# Altium PCB V2.PcbDoc
Units mm, origin at the board's own origin, x right, y up, seen from the top; angles counter-clockwise.
Board outline 33.02 x 29.34 mm, 2 copper layers (Top Layer, Bottom Layer); 2 components, 24 nets, 48 pads, 28 vias.
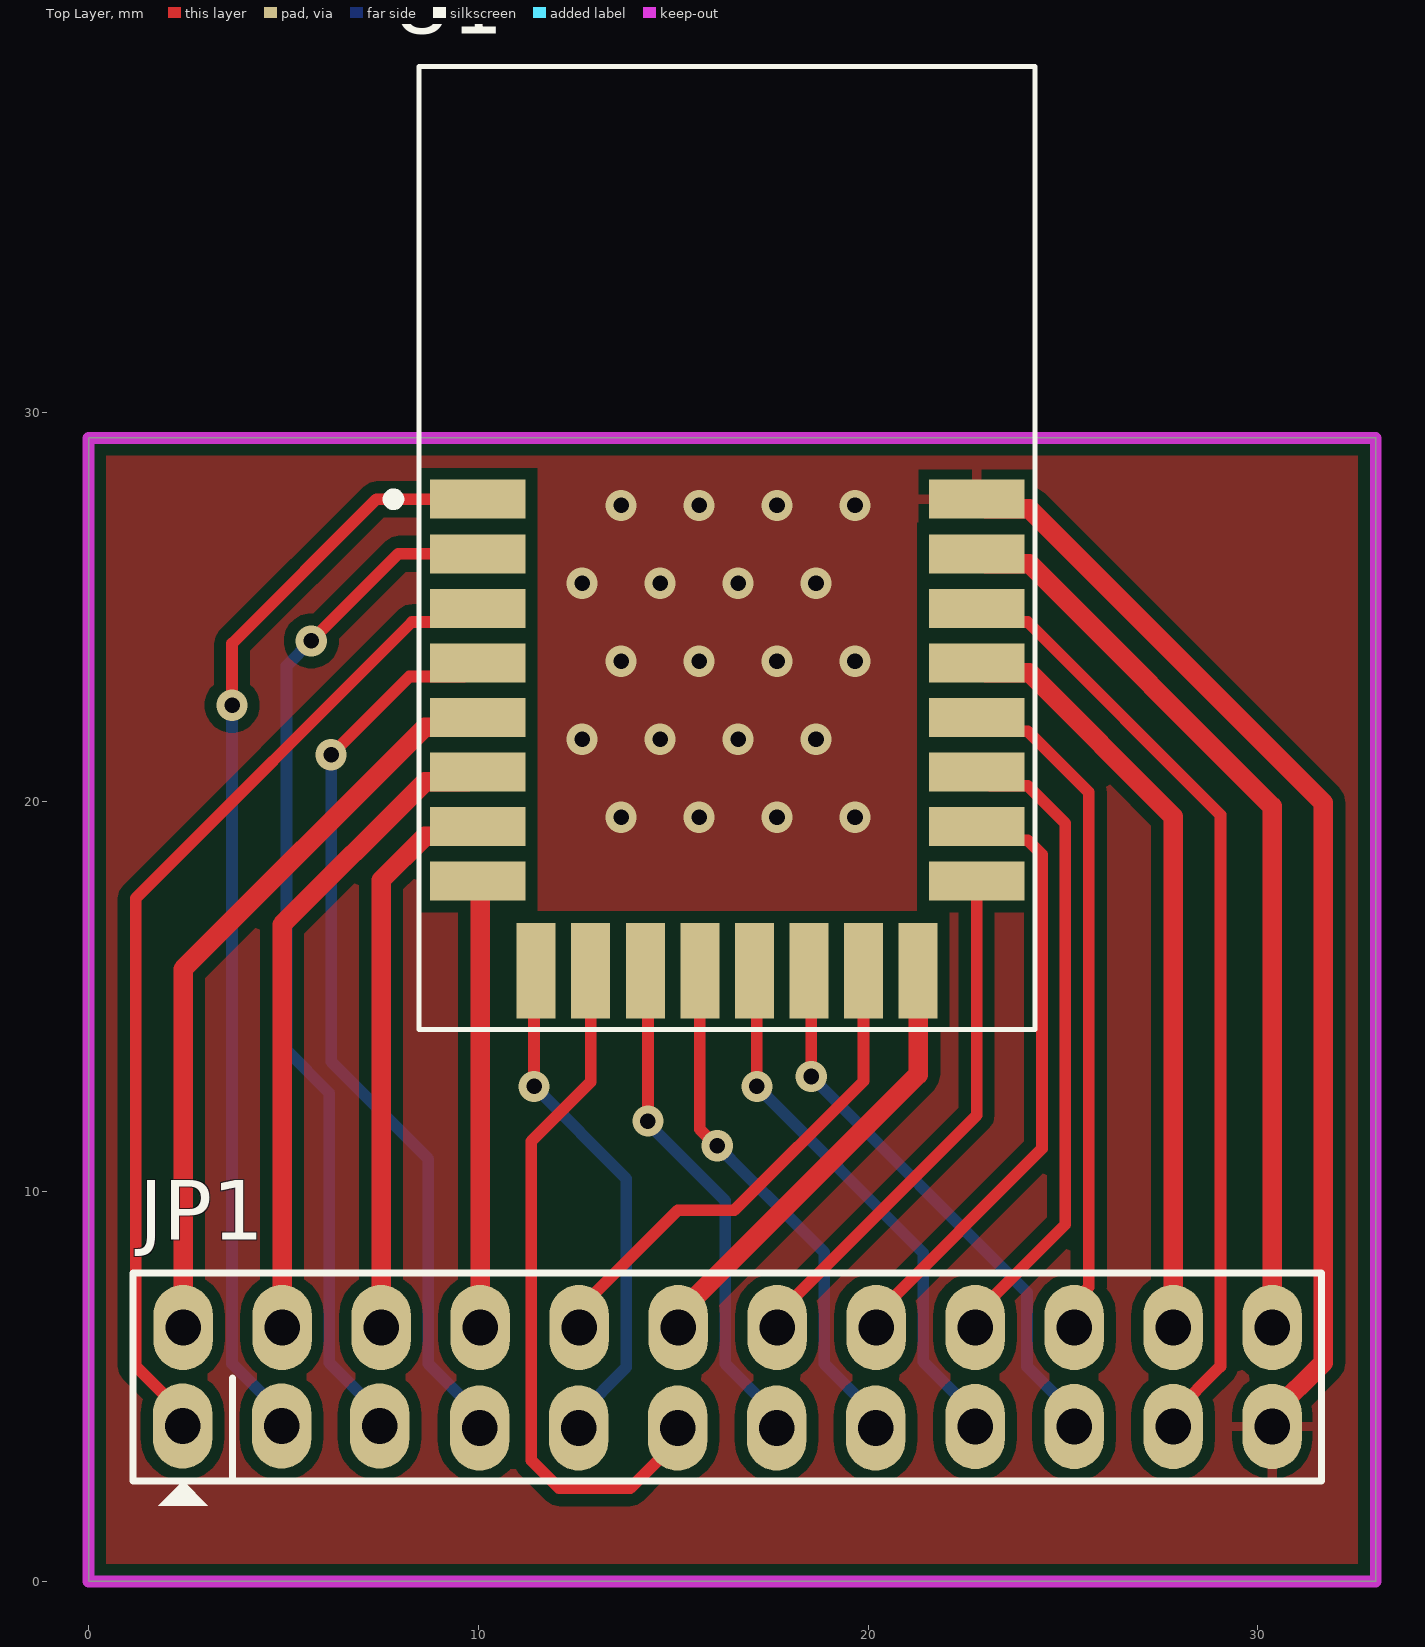
[diagram p0: Top Layer view]
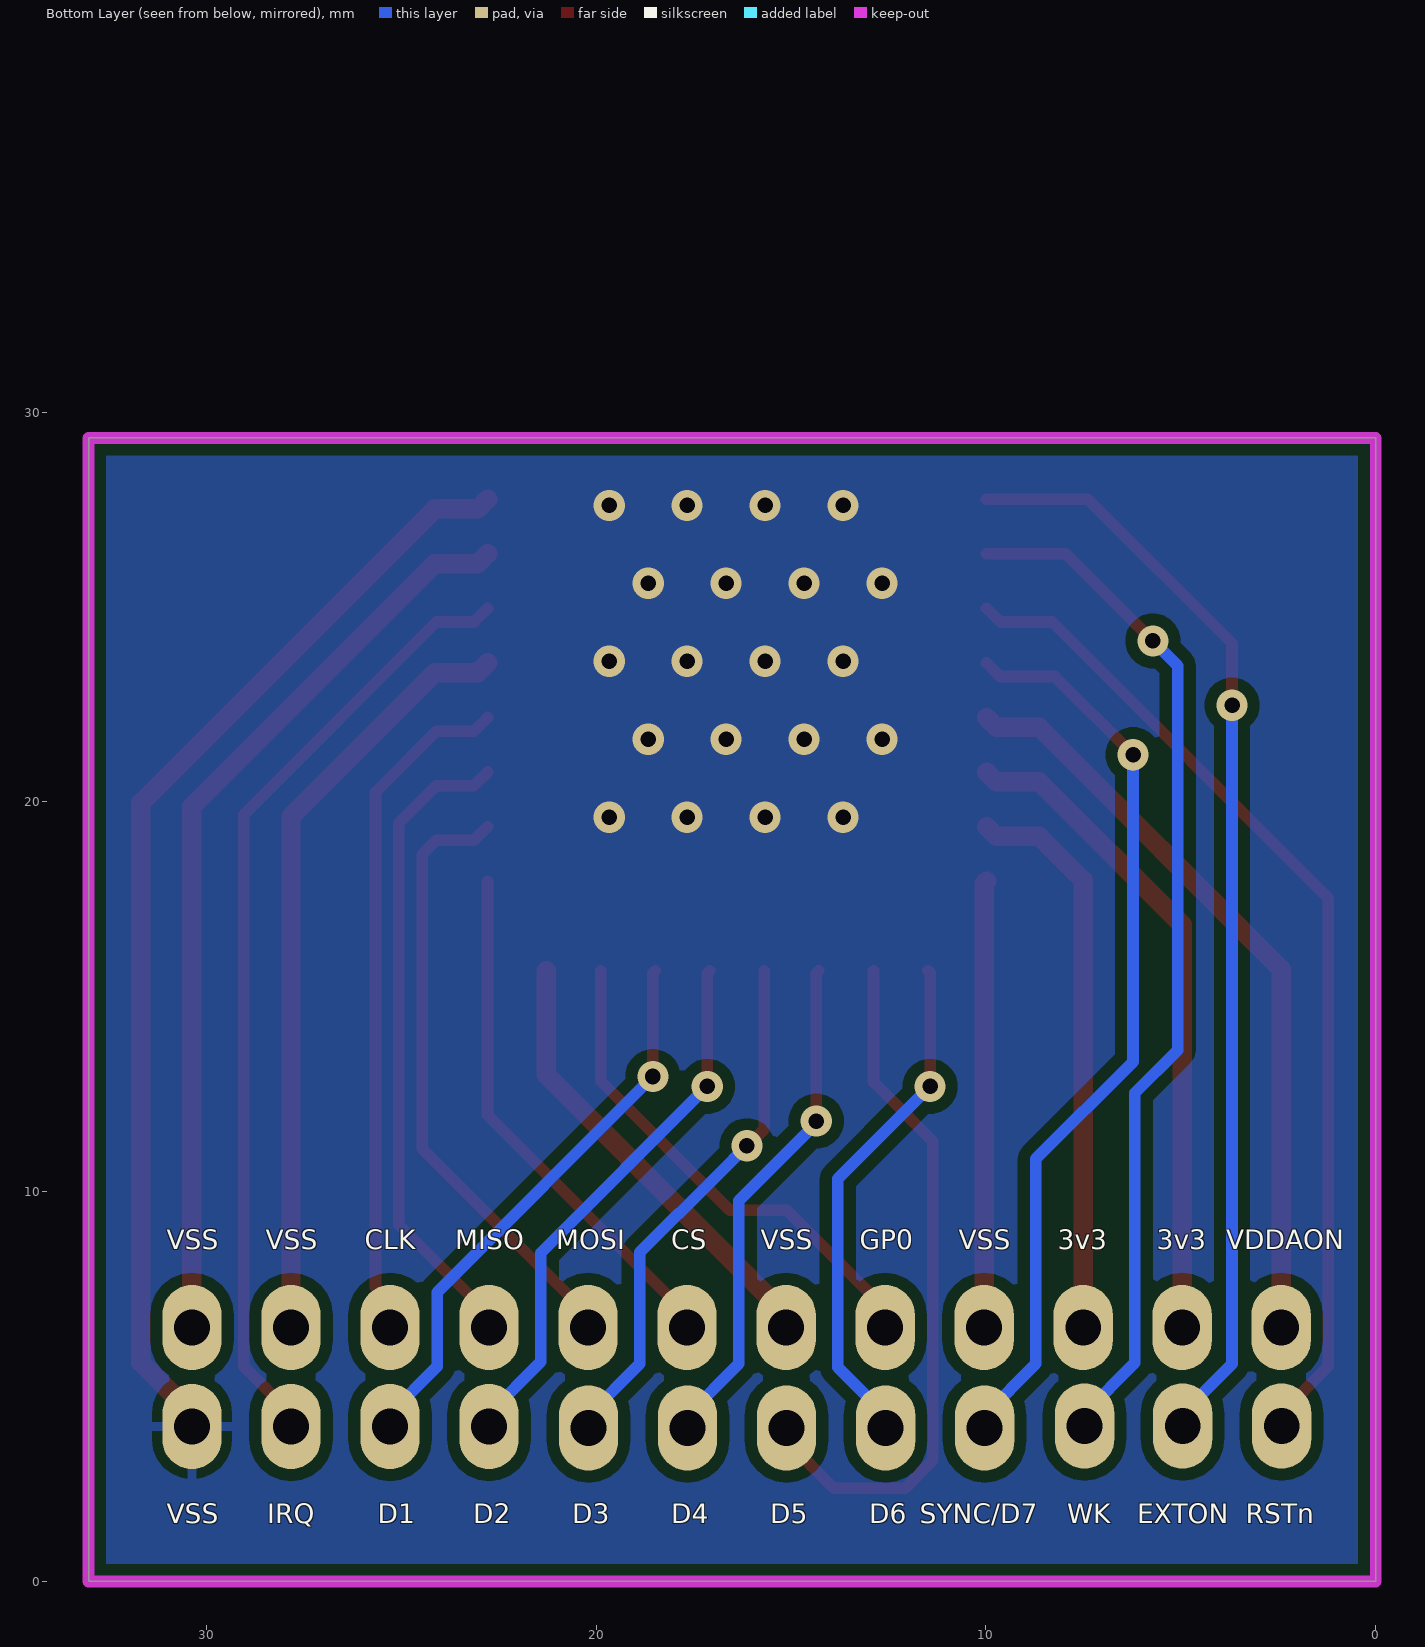
[diagram p1: Bottom Layer view, seen from below]

## Layer stack, top to bottom
Top Solder: solder mask 0.0102, Solder Resist, Dk 3.5
Top Layer: signal copper 0.0356
Dielectric 1: dielectric 0.32, FR-4, Dk 4.8
Bottom Layer: signal copper 0.0356
Bottom Solder: solder mask 0.0102, Solder Resist, Dk 3.5

## Board outline
0,0 33.02,0 33.02,29.337 0,29.337

## Design rules (kind name [scope] priority, off if disabled: settings)
Clearance "Stitching VSS_5" [IsStitchingVia and InNet('VSS_5') vs (IsVia and (Not IsStitchingVia)) Or IsPad] p1: gap=1.27 ignorepadtopadclearanceinfootprint=FALSE
Clearance [All] p2: gap=0.3 ignorepadtopadclearanceinfootprint=FALSE
PolygonConnect [All] p1: connectstyle=Relief reliefconductorwidth=0.254 reliefentries=4 polygonreliefangle="90 Angle" airgapwidth=0.254
RoutingVias [All] p1: holewidth=0.3 width=0.6 viastyle="Through Hole" minholewidth=0.3 minwidth=0.6 maxholewidth=0.3 maxwidth=0.6
SolderMaskExpansion [All] p1: expansion=0.102 istentingtop=FALSE
Width POWER [InNetClass('POW')] p1: maxlimit=1 minlimit=0.3 preferedwidth=0.5
Width RON [InNetClass('RON')] p2: maxlimit=0.5 minlimit=0.2 preferedwidth=0.3
Width [All] p3 off: maxlimit=0.254 minlimit=0.254 preferedwidth=0.254
30 further rules are at their usual default settings.

## Classes and differential pairs
net class RON: CLK CS EXTON GP0 GP1 GP2 GP3 GP4 GP5 GP6 IRQ/GP8 MISO MOSI RSTn SYNC/GP7 WAKEUP
net class POW: VDD3v3_1 VDD3v3_2 VDDAON VSS_1 VSS_2 VSS_3 VSS_4 VSS_5

## Components (designator, comment, footprint, x,y, rotation, side; value= is the part's Value field where it differs from the comment)
JP1 "Connector 12x2" JP12X2_2 2.426,3.975 r0 top
U1 "DWM1000" XCVR_DWM1000 16.383,21.717 r0 top

## Footprints (in the part's own frame and the unit in brackets; to place one, negate y for a bottom-side part, rotate by r counter-clockwise, add the part's x,y. Pads: shape width x height; smd on the part's side, far side on the other; paste and mask are expansions set on the pad)
JP12X2_2 [mil]
  oval 60x86 hole 36: 1(-0.5,0.5) 2(99.5,0.5) 3(198.5,0.5) 4(299.5,-1.5) 5(399.5,-1.5) 6(499.5,-1.5) 7(599.5,-1.5) 8(699.5,-1.5) 9(800,0) 10(900,0) 11(1000,0) 12(1100,0) 13(0,100) 14(100,100) 15(200,100) 16(300,100) 17(400,100) 18(500,100) 19(600,100) 20(700,100) 21(800,100) 22(900,100) 23(1000,100) 24(1100,100)
  silkscreen extent -50,-80 1150,155, body extent -50,-395 1150,112, height 217
XCVR_DWM1000 [mm]
  rect 2.45x1 smd: 1(-6.4,6.048) 2(-6.4,4.648) 3(-6.4,3.248) 4(-6.4,1.848) 5(-6.4,0.448) 6(-6.4,-0.952) 7(-6.4,-2.352) 8(-6.4,-3.752) 17(6.4,-3.752) 18(6.4,-2.352) 19(6.4,-0.952) 20(6.4,0.448) 21(6.4,1.848) 22(6.4,3.248) 23(6.4,4.648) 24(6.4,6.048)
  rect 1x2.45 smd: 9(-4.9,-6.047) 10(-3.5,-6.047) 11(-2.1,-6.047) 12(-0.7,-6.047) 13(0.7,-6.047) 14(2.1,-6.047) 15(3.5,-6.047) 16(4.9,-6.047)
  silkscreen extent -8.69,-7.55 7.9,17.15, body extent -6.6,-6.25 6.6,16.75, height 3.15

## Part data
JP1: library part JP12x2
U1: "802.15.4 IR-UWB Transceiver Module 3.5GHz ~ 6.5GHz Integrated, Chip Surface Mount", Package="Module Decawave", Availability=Unavailable, MF="Decawave Limited", MP=DWM1000, Price=None, SnapEDA_Link=https://www.snapeda.com/parts/DWM1000/Decawave%20Limited/view-part/327593/?ref=snap

## Via types
v1: diameter 0.8, hole 0.4, Top Layer to Bottom Layer, 28 vias

## Nets (pads, with @x,y where several pads share a name; then routed paths per layer and width w, separated by ;. In a path a pad name is that pad's centre, name@x,y a point inside that pad or via, vN(x,y) a via of type N, cw(c..) or ccw(c..) an arc to the next point about the centre after c; other vN are vias at no path point)
CLK: JP1.22 U1.20 | length 17.6
  Top Layer w0.3: U1.20 23.133,21.815 24.094,21.815 25.658,20.251 25.658,7.549 25.286,7.177 JP1.22
CS: JP1.19 U1.17 | length 13.6
  Top Layer w0.3: JP1.19 17.666,6.845 22.783,11.963 U1.17
EXTON: JP1.2 U1.1 | length 28.4
  Top Layer w0.3: v1(3.683,22.479) 3.683,24.062 7.385,27.765 U1.1
  Bottom Layer w0.3: v1(3.683,22.479) 3.683,5.588 4.953,4.318 JP1.2
GP0: JP1.17 U1.15 | length 13
  Top Layer w0.3: JP1.17 12.586,6.998 15.113,9.525 16.569,9.525 19.883,12.839 U1.15
GP1: JP1.10 U1.14 | length 14.5
  Top Layer w0.3: U1.14 18.542,15.611 v1(18.542,12.954)
  Bottom Layer w0.3: v1(18.542,12.954) 24.074,7.422 24.074,5.517 25.286,4.305 JP1.10
GP2: JP1.9 U1.13 | length 14
  Top Layer w0.3: U1.13 17.145,15.608 v1(17.145,12.7)
  Bottom Layer w0.3: v1(17.145,12.7) 21.418,8.427 21.418,5.633 22.746,4.305 JP1.9
GP3: JP1.8 U1.12 | length 13.6
  Top Layer w0.3: U1.12 15.683,11.602 16.109,11.176 v1(16.129,11.176)
  Bottom Layer w0.3: v1(16.129,11.176) 16.851,10.454 17.859,9.446 17.879,9.446 18.878,8.447 18.878,5.583 20.193,4.267 JP1.8
GP4: JP1.7 U1.11 | length 13.1
  Top Layer w0.3: U1.11 14.351,15.602 v1(14.351,11.811)
  Bottom Layer w0.3: v1(14.351,11.811) 14.351,11.752 16.338,9.765 16.338,5.583 17.653,4.267 JP1.7
GP5: JP1.6 U1.10 | length 18.1
  Top Layer w0.3: U1.10 12.883,12.815 11.361,11.293 11.361,3.105 12.071,2.395 13.901,2.395 15.113,3.607 JP1.6
GP6: JP1.5 U1.9 | length 13.2
  Top Layer w0.3: v1(11.43,12.7) 11.43,15.617 U1.9
  Bottom Layer w0.3: v1(11.43,12.7) 13.798,10.332 13.798,5.492 12.573,4.267 JP1.5
IRQ/GP8: JP1.11 U1.22 | length 24.6
  Top Layer w0.3: U1.22 23.133,24.614 24.094,24.614 29.038,19.671 29.038,5.517 27.826,4.305 JP1.11
MISO: JP1.21 U1.19 | length 16.7
  Top Layer w0.3: JP1.21 22.746,6.845 25.058,9.158 25.058,19.451 24.094,20.415 23.133,20.415 U1.19
MOSI: JP1.20 U1.18 | length 15.9
  Top Layer w0.3: JP1.20 20.206,6.845 24.458,11.098 24.458,18.651 24.094,19.015 23.133,19.015 U1.18
RSTn: JP1.1 U1.3 | length 25.9
  Top Layer w0.3: JP1.1 2.413,4.318 1.214,5.517 1.214,17.529 8.299,24.614 9.633,24.614 U1.3
SYNC/GP7: JP1.4 U1.4 | length 23.6
  Top Layer w0.3: v1(6.223,21.209) 8.229,23.215 9.633,23.215 U1.4
  Bottom Layer w0.3: v1(6.223,21.209) 6.223,13.335 8.718,10.84 8.718,5.583 10.033,4.267 JP1.4
VDD3v3_1: JP1.14 U1.6 | length 17
  Top Layer w0.5: JP1.14 4.966,16.85 8.63,20.515 9.733,20.515 U1.6
VDD3v3_2: JP1.15 U1.7 | length 14.5
  Top Layer w0.5: JP1.15 7.506,17.99 8.63,19.115 9.733,19.115 U1.7
VDDAON: JP1.13 U1.5 | length 19.4
  Top Layer w0.5: JP1.13 2.426,15.71 8.63,21.915 9.733,21.915 U1.5
VSS_1: JP1.16 U1.8 | length 11.5
  Top Layer w0.5: U1.8 10.046,17.902 JP1.16
VSS_2: JP1.18 U1.16 | length 11.7
  Top Layer w0.5: JP1.18 15.126,6.845 21.283,13.003 U1.16
VSS_3: JP1.23 U1.21 | length 19.8
  Top Layer w0.5: U1.21 23.033,23.314 24.136,23.314 27.826,19.625 JP1.23
VSS_4: JP1.24 U1.23 | length 23.6
  Top Layer w0.5: U1.23 23.033,26.114 24.136,26.114 30.366,19.885 JP1.24
VSS_5: JP1.12 U1.24 | length 28.7
  Top Layer w0.5: U1.24 23.033,27.514 24.136,27.514 31.678,19.973 31.678,5.617 30.366,4.305 JP1.12
  other v1: 13.663,19.607 15.663,19.607 17.663,19.607 19.663,19.607 12.663,21.607 14.663,21.607 16.663,21.607 18.663,21.607 13.663,23.607 15.663,23.607 17.663,23.607 19.663,23.607 12.663,25.607 14.663,25.607 16.663,25.607 18.663,25.607 13.663,27.607 15.663,27.607 17.663,27.607 19.663,27.607
WAKEUP: JP1.3 U1.2 | length 26.6
  Top Layer w0.3: v1(5.715,24.13) 7.95,26.365 U1.2
  Bottom Layer w0.3: v1(5.715,24.13) 5.08,23.495 5.08,13.629 6.178,12.532 6.178,5.608 7.468,4.318 JP1.3

## Polygon pours and split planes (outlines as drawn)
VSS_5 on Top Layer "VSS_5_L01_P000" (solid, remove dead copper, pour order 0): 0,29.337 33.02,29.337 33.02,0 0,0
VSS_5 on Bottom Layer "VSS_5_L02_P002" (solid, remove dead copper, pour order 2): 0,29.337 0,0 33.02,0 33.02,29.337
no net on Bottom Layer "NONET_L02_P001" (solid, remove dead copper, pour order 1): 0,29.337 33.02,29.337 33.02,0 0,0

## Keep-outs
Keep-Out Layer:
  the board outline again, w0.3

## Silkscreen, mask and mechanical layers (free items; w line width, h text height)
Bottom Overlay:
  text "VDDAON" at 3.829,8.517 h0.5
  text "3v3" at 5.619,8.517 h0.5
  text "3v3" at 8.159,8.517 h0.5
  text "VSS" at 10.699,8.517 h0.5
  text "GP0" at 13.239,8.517 h0.5
  text "VSS" at 15.779,8.517 h0.5
  text "CS" at 18.07,8.517 h0.5
  text "MOSI" at 21.026,8.517 h0.5
  text "MISO" at 23.608,8.517 h0.5
  text "CLK" at 25.939,8.517 h0.5
  text "VSS" at 28.479,8.517 h0.5
  text "VSS" at 31.019,8.517 h0.5
  text "RSTn" at 3.329,1.497 h0.5
  text "EXTON" at 6.119,1.497 h0.5
  text "WK" at 7.91,1.497 h0.5
  text "SYNC/D7" at 11.699,1.497 h0.5
  text "D6" at 12.99,1.497 h0.5
  text "D5" at 15.53,1.497 h0.5
  text "D4" at 18.07,1.497 h0.5
  text "D3" at 20.61,1.497 h0.5
  text "D2" at 23.15,1.497 h0.5
  text "D1" at 25.606,1.497 h0.5
  text "IRQ" at 28.438,1.497 h0.5
  text "VSS" at 31.019,1.497 h0.5